# Altium PCB motor_driver6.PcbDoc
Units mm, origin at the board's own origin, x right, y up, seen from the top; angles counter-clockwise.
Board outline 27.3 x 14.1 mm, 2 copper layers (Top Layer, Bottom Layer); 20 components, 20 nets, 68 pads, 9 vias.
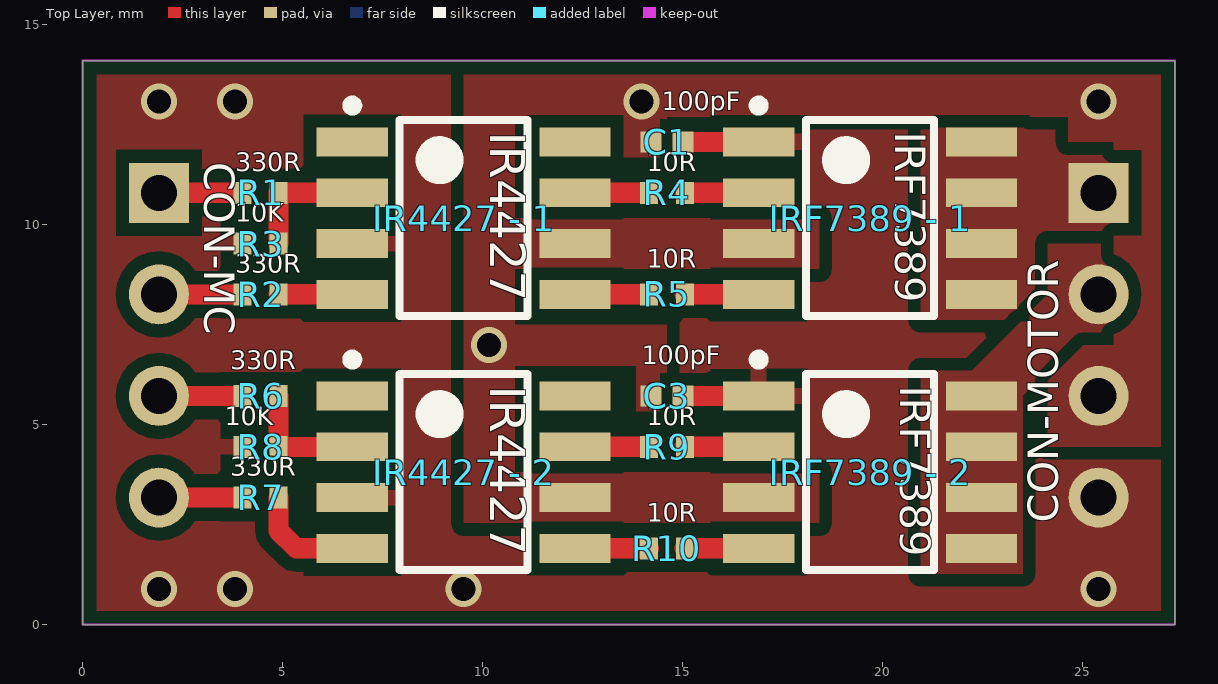
[diagram p0: Top Layer view]
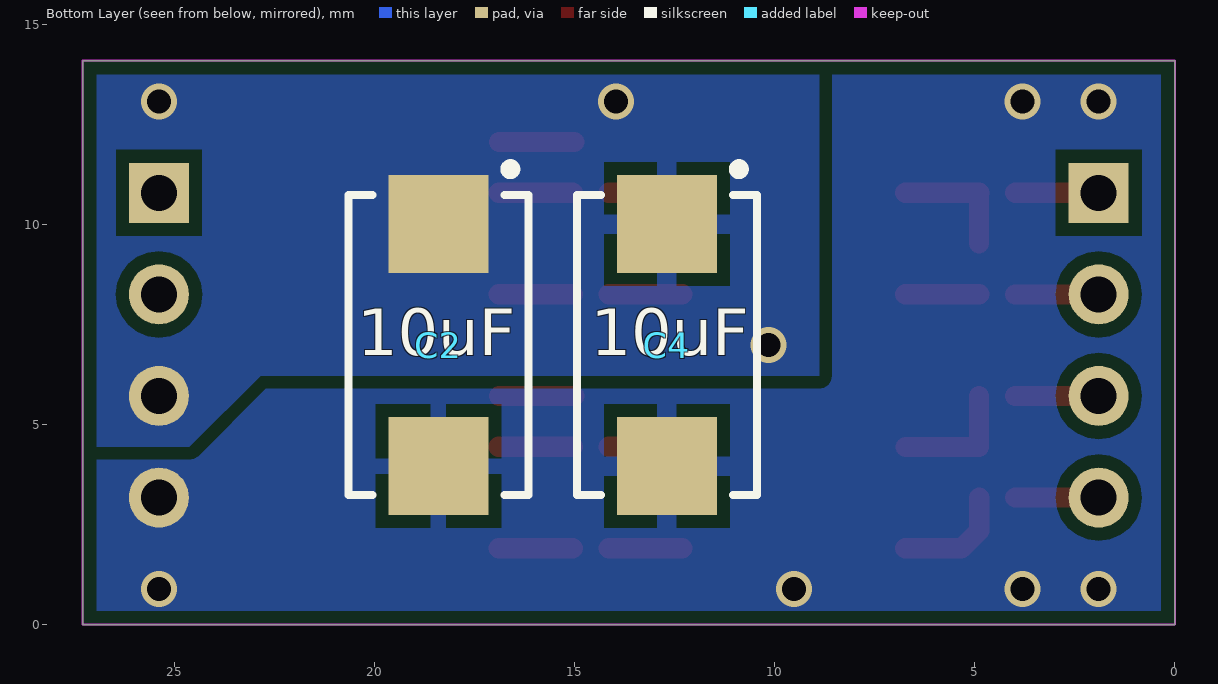
[diagram p1: Bottom Layer view, seen from below]

## Layer stack, top to bottom
Top Solder: solder mask 0.0102, Solder Resist, Dk 3.5
Top Layer: signal copper 0.0356
Dielectric 1: dielectric 0.32, FR-4, Dk 4.8
Bottom Layer: signal copper 0.0356
Bottom Solder: solder mask 0.0102, Solder Resist, Dk 3.5

## Board outline
0,0 27.305,0 27.305,14.097 0,14.097

## Design rules (kind name [scope] priority, off if disabled: settings)
Clearance Clearance_1 [InNamedPolygon('VCC_L02_P075')] p1 off: gap=0.16 ignorepadtopadclearanceinfootprint=FALSE except(0: Arc-Hole Track-Hole SMDPad-Hole THPad-Hole Via-Hole Fill-Hole Poly-Hole Region-Hole Text-Hole)
Clearance [All] p2: gap=0.32 ignorepadtopadclearanceinfootprint=FALSE except(0: Arc-Hole Track-Hole SMDPad-Hole THPad-Hole Via-Hole Fill-Hole Poly-Hole Region-Hole Text-Hole; 0.28: Track-SMDPad SMDPad-SMDPad)
MinimumSolderMaskSliver [All] p1 off: minsoldermaskwidth=0.254
PlaneConnect [All] p1: planeconnectstyle=Relief reliefexpansion=0.508 reliefentries=4 reliefconductorwidth=0.5 reliefairgap=0.254
PolygonConnect [IsVia] p1: connectstyle=Direct reliefconductorwidth=0.254 reliefentries=4 polygonreliefangle="90 Angle" airgapwidth=0.254
PolygonConnect "Schematic Polygon Connect Style_9" [InNet('MA_MBHB')] p2: connectstyle=Direct reliefconductorwidth=0.254 reliefentries=4 polygonreliefangle="45 Angle" airgapwidth=0.254
PolygonConnect "Schematic Polygon Connect Style_8" [InNet('MA')] p3: connectstyle=Direct reliefconductorwidth=0.254 reliefentries=4 polygonreliefangle="45 Angle" airgapwidth=0.254
PolygonConnect "Schematic Polygon Connect Style_7" [InComponent('C2_MAHB')] p4: connectstyle=Direct reliefconductorwidth=0.254 reliefentries=4 polygonreliefangle="45 Angle" airgapwidth=0.254
PolygonConnect "Schematic Polygon Connect Style" [InComponent('C2_MBHB')] p5: connectstyle=Relief reliefconductorwidth=0.5 reliefentries=4 polygonreliefangle="90 Angle" airgapwidth=0.32
PolygonConnect PolygonConnect_2 [IsThruPin] p6: connectstyle=Direct reliefconductorwidth=0.5 reliefentries=4 polygonreliefangle="90 Angle" airgapwidth=0.254
PolygonConnect "Schematic Polygon Connect Style_5" [InNet('NetIC2_4')] p7 off: connectstyle=Direct reliefconductorwidth=0.254 reliefentries=4 polygonreliefangle="45 Angle" airgapwidth=0.254
PolygonConnect "Schematic Polygon Connect Style_4" [InNet('NetIC4_2')] p8 off: connectstyle=Direct reliefconductorwidth=0.254 reliefentries=4 polygonreliefangle="45 Angle" airgapwidth=0.254
PolygonConnect "Schematic Polygon Connect Style_3" [InNet('NetIC4_4')] p9 off: connectstyle=Direct reliefconductorwidth=0.254 reliefentries=4 polygonreliefangle="45 Angle" airgapwidth=0.254
PolygonConnect "Schematic Polygon Connect Style_2" [InNet('NetIC4_5')] p10 off: connectstyle=Direct reliefconductorwidth=0.254 reliefentries=4 polygonreliefangle="45 Angle" airgapwidth=0.254
PolygonConnect "Schematic Polygon Connect Style_1" [InNet('MA')] p11 off: connectstyle=Direct reliefconductorwidth=0.254 reliefentries=4 polygonreliefangle="45 Angle" airgapwidth=0.254
PolygonConnect PolygonConnect_1 [InNet('VCC')] p12: connectstyle=Direct reliefconductorwidth=0.5 reliefentries=4 polygonreliefangle="90 Angle" airgapwidth=0.254
PolygonConnect PolygonConnect_3 [All] p13: connectstyle=Relief reliefconductorwidth=0.4 reliefentries=4 polygonreliefangle="90 Angle" airgapwidth=0.32
RoutingVias [All] p1: holewidth=0.3 width=0.6 viastyle="Through Hole" minholewidth=0.2 minwidth=0.5 maxholewidth=0.4 maxwidth=1.27
SilkToSilkClearance [All] p1 off: silktosilkclearance=0.254
SilkToSolderMaskClearance [IsPad] p1 off: minsilkscreentomaskgap=0.254 clearancetoexposedcopper=TRUE
SolderMaskExpansion [All] p1: expansion=0.102
Width [All] p1: maxlimit=1 minlimit=0.254 preferedwidth=0.254
26 further rules are at their usual default settings.

## Classes and differential pairs
component class motor_driver: CON-MC CON-MOTOR R4 R5
component class MAHB: C1 C3 "IR4427 - 1" "IRF7389 - 1" R1 R2 R3 R4 R5
component class MBHB: C3 R1 R4
channel class half_bridge: MAHB MBHB

## Components (designator, comment, footprint, x,y, rotation, side; value= is the part's Value field where it differs from the comment)
C1 "100pF" 0402-CAP 14.605,12.065 r0 top
C2 "4,7UF" PCBComponent 18.415,6.985 r270 bottom
C3 "100pF" 0402-CAP 14.605,5.715 r0 top (schematic designator C1)
C4 "4,7UF" PCBComponent 12.7,6.985 r270 bottom (schematic designator C2)
CON-MC "22032041" 04x01_Conector_Male 1.905,6.985 r90 top
CON-MOTOR "22032041" 04x01_Conector_Male 25.4,6.985 r90 top
"IR4427 - 1" "IR4427STRPBF" IR4427-PCB 9.525,10.16 r0 top (schematic designator IR4427)
"IR4427 - 2" "IR4427STRPBF" IR4427-PCB 9.525,3.81 r0 top (schematic designator IR4427)
"IRF7389 - 1" "IRF7389TRPBF" IRF7389-PCB 19.685,10.16 r0 top (schematic designator IRF7389)
"IRF7389 - 2" "IRF7389TRPBF" IRF7389-PCB 19.685,3.81 r0 top (schematic designator IRF7389)
R1 "330R" 0402-RES-HD 4.445,10.795 r0 top
R2 "330R" 0402-RES-HD 4.445,8.255 r0 top
R3 "10K" 0402-RES-HD 4.445,9.525 r0 top
R4 "10R" 0402-RES-HD 14.605,10.795 r0 top
R5 "10R" 0402-RES-HD 14.605,8.255 r0 top
R6 "330R" 0402-RES-HD 4.445,5.715 r0 top (schematic designator R1)
R7 "330R" 0402-RES-HD 4.445,3.175 r0 top (schematic designator R2)
R8 "10K" 0402-RES-HD 4.445,4.445 r0 top (schematic designator R3)
R9 "10R" 0402-RES-HD 14.605,4.445 r0 top (schematic designator R4)
R10 "10R" 0402-RES-HD 14.605,1.905 r0 top (schematic designator R5)

## Footprints (in the part's own frame and the unit in brackets; to place one, negate y for a bottom-side part, rotate by r counter-clockwise, add the part's x,y. Pads: shape width x height; smd on the part's side, far side on the other; paste and mask are expansions set on the pad)
04x01_Conector_Male [mm] "0022032041"
  round 1.5 hole 0.9: 0(-3.81,0) 1(-1.27,0) 2(1.27,0)
  rect 1.5x1.5 hole 0.9: 3(3.81,0)
  body extent -4.95,-1.18 4.95,1.18, height 3.38
0402-CAP [mm] "Chip Capacitor, Body 1.0x0.5mm, Height 0.6mm, IPC Medium Density"
  rect 0.52x0.52 smd: 1(-0.4,0) 2(0.4,0)
  body extent -0.55,-0.3 0.55,0.3, height 0.33
0402-RES-HD [mm] "Chip Resistor, Body 1.0x0.5mm, IPC High Density"
  rect 0.45x0.55 smd: 1(-0.45,0) 2(0.45,0)
  body extent -0.52,-0.27 0.53,0.28, height 0.4
IR4427-PCB [mm] "SOIC, 8-Leads, Body 4,85x3,90mm, Pitch 1,27mm, IPC Medium Density"
  rect 1.78x0.72 smd: 1(-2.785,1.905) 2(-2.785,0.635) 3(-2.785,-0.635) 4(-2.785,-1.905) 5(2.785,-1.905) 6(2.785,-0.635) 7(2.785,0.635) 8(2.785,1.905)
  silkscreen extent -2.91,-2.45 1.6,2.94, body extent -2,-2.45 2,2.45, height 1.75
IRF7389-PCB [mm] "SOIC, 8-Leads, Body 4,85x3,90mm, Pitch 1,27mm, IPC Medium Density"
  rect 1.78x0.72 smd: 1(-2.785,1.905) 2(-2.785,0.635) 3(-2.785,-0.635) 4(-2.785,-1.905) 5(2.785,-1.905) 6(2.785,-0.635) 7(2.785,0.635) 8(2.785,1.905)
  silkscreen extent -2.91,-2.45 1.6,2.94, body extent -2,-2.45 2,2.45, height 1.75
PCBComponent [mm]
  rect 2.45x2.5 smd: 1(-3.025,0) 2(3.025,0)
  silkscreen extent -4.52,-2.25 3.75,2.25, body extent -3.75,-2.25 3.75,2.25, height 2.9

## Part data
C1 C3: library part CC0402-100pF-A.2, "CAP CER 100PF 50V 1% NP0 0402"
C2 C4: library part TPSD106K035R0300-01.A.1, "Tantalum Capacitors - Solid SMD 10uF 35V 10% L ESR"
CON-MC CON-MOTOR: library part 04x01_Conector_Male-SCH, "CONN HEADER 4POS .100 VERT TIN"
"IR4427 - 1" "IR4427 - 2": library part IR4427, "IC DRIVER DUAL LOW SIDE 8-DIP"
"IRF7389 - 1" "IRF7389 - 2": library part IRF7389, "MOSFET N/P-CH 30V 8-SOIC"
R1 R2 R6 R7: library part R0402-330R-7, "RES 330 OHM 1/10W 1% 0402 SMD"
R3 R8: library part R0402-10K-10, "RES 10K OHM 1/10W 1% 0402 SMD"
R4 R5 R9 R10: library part R0402-10R-6, "RES 10 OHM 1/10W 1% 0402 SMD"

## Via types
v1: diameter 0.9, hole 0.6, Top Layer to Bottom Layer, 9 vias

## Nets (pads, with @x,y where several pads share a name; then routed paths per layer and width w, separated by ;. In a path a pad name is that pad's centre, name@x,y a point inside that pad or via, vN(x,y) a via of type N, cw(c..) or ccw(c..) an arc to the next point about the centre after c; other vN are vias at no path point)
GND: "IR4427 - 1.3" "IR4427 - 2.3" "IRF7389 - 1.1" "IRF7389 - 2.1" C1.2 C2.2 C3.2 C4.2 CON-MOTOR.0 R3.1 R8.1 | length 3.8
  Top Layer w0.5: C3.2 16.9,5.715 ; C1.2 16.9,12.065
  other v1: 1.905,0.889 3.81,0.889 9.525,0.889 25.4,0.889 1.905,13.081 3.81,13.081
MA: "IRF7389 - 2.5" "IRF7389 - 2.6" "IRF7389 - 2.7" "IRF7389 - 2.8" CON-MOTOR.2
MA_MBHB: "IRF7389 - 1.5" "IRF7389 - 1.6" "IRF7389 - 1.7" "IRF7389 - 1.8" CON-MOTOR.3
MAH: CON-MC.0 R7.1 | length 2.1
  Top Layer w0.508: CON-MC.0 R7.1
MAL: CON-MC.1 R6.1 | length 2.1
  Top Layer w0.5: CON-MC.1 R6.1
MBH: CON-MC.2 R2.1 | length 2.1
  Top Layer w0.5: CON-MC.2 R2.1
MBL: CON-MC.3 R1.1 | length 2.1
  Top Layer w0.508: CON-MC.3 R1.1
NetIR4427_MAHB_2: "IR4427 - 2.2" R6.2 R8.2 | length 3.1
  Top Layer w0.5: R6.2 R8.2 6.74,4.445
NetIR4427_MAHB_4: "IR4427 - 2.4" R7.2 | length 2.9
  Top Layer w0.508: R7.2 4.895,2.344 5.334,1.905 6.74,1.905
NetIR4427_MAHB_5: "IR4427 - 2.5" R10.1 | length 1.8
  Top Layer w0.508: 12.31,1.905 R10.1
NetIR4427_MAHB_7: "IR4427 - 2.7" R9.1 | length 1.8
  Top Layer w0.508: 12.31,4.445 R9.1
NetIR4427_MBHB_2: "IR4427 - 1.2" R1.2 R3.2 | length 3.1
  Top Layer w0.5: R3.2 R1.2
  Top Layer w0.508: R1.2 6.74,10.795
NetIR4427_MBHB_4: "IR4427 - 1.4" R2.2 | length 1.8
  Top Layer w0.508: R2.2 6.74,8.255
NetIR4427_MBHB_5: "IR4427 - 1.5" R5.1 | length 1.8
  Top Layer w0.508: 12.31,8.255 R5.1
NetIR4427_MBHB_7: "IR4427 - 1.7" R4.1 | length 1.8
  Top Layer w0.508: 12.31,10.795 R4.1
NetIRF7389_MAHB_2: "IRF7389 - 2.2" R9.2 | length 1.8
  Top Layer w0.508: R9.2 16.9,4.445
NetIRF7389_MAHB_4: "IRF7389 - 2.4" R10.2 | length 1.8
  Top Layer w0.508: R10.2 16.9,1.905
NetIRF7389_MBHB_2: "IRF7389 - 1.2" R4.2 | length 1.8
  Top Layer w0.508: R4.2 16.9,10.795
NetIRF7389_MBHB_4: "IRF7389 - 1.4" R5.2 | length 1.8
  Top Layer w0.508: R5.2 16.9,8.255
VCC: "IR4427 - 1.6" "IR4427 - 2.6" "IRF7389 - 1.3" "IRF7389 - 2.3" C1.1 C2.1 C3.1 C4.1 CON-MOTOR.1
  other v1: 10.16,6.985 13.97,13.081 25.4,13.081
pads on no net: "IR4427 - 1.1" "IR4427 - 1.8" "IR4427 - 2.1" "IR4427 - 2.8"

## Polygon pours and split planes (outlines as drawn)
MA on Top Layer "Top Layer-No Net" (solid, remove dead copper, pour order 74): 26.289,9.525 24.13,9.525 24.13,8.255 22.225,6.35 20.955,6.35 20.955,1.27 23.495,1.27 23.495,5.715 24.765,6.985 26.289,6.985
VCC on Top Layer "Top Layer-No Net" (solid, remove dead copper, pour order 73): 24.13,4.445 24.13,6.096 24.638,6.604 25.019,6.985 25.781,6.985 25.781,12.065 24.638,12.065 24.638,12.7 25.781,12.7 20.955,12.7 19.431,12.7 14.605,12.7 14.605,11.684 13.335,11.684 13.335,12.7 10.795,12.7 10.795,10.16 18.415,10.16 18.415,8.89 10.795,8.89 10.795,7.493 14.605,7.493 14.605,6.477 14.605,5.334 13.843,5.334 13.843,6.477 10.795,6.477 10.795,3.81 18.415,3.81 18.415,2.54 9.525,2.54 9.525,13.97 27.305,13.97 27.305,4.445
MA_MBHB on Top Layer "Top Layer-No Net" (solid, remove dead copper, pour order 78): 20.955,7.62 20.955,12.7 26.67,12.7 26.67,9.525 25.4,9.525 24.13,8.255 24.13,7.62
GND on Top Layer "Top Layer-No Net" (solid, remove dead copper, pour order 90): 0,14.097 27.305,14.097 27.305,0 0,0
GND on Bottom Layer "Top Layer-No Net" (solid, remove dead copper, pour order 94): 27.305,0 27.305,14.097 0,14.097 0,0
VCC on Bottom Layer "Top Layer-No Net" (solid, remove dead copper, pour order 77): 27.305,4.445 24.638,4.445 22.86,6.223 8.89,6.223 8.89,6.985 8.89,14.097 27.305,14.097

## Keep-outs
Keep-Out Layer:
  the board outline again, w0.05

## Silkscreen, mask and mechanical layers (free items; w line width, h text height)
Top Overlay:
  text "100pF" at 14.478,12.7 h0.8
  text "IR4427" at 9.906,12.319 h1.5 r270
  text "IRF7389" at 20.066,12.319 h1.3 r270
  text "330R" at 3.81,11.176 h0.8
  text "10R" at 14.097,11.176 h0.8
  text "10K" at 3.81,9.906 h0.8
  text "10R" at 14.097,8.763 h0.8
  text "330R" at 3.81,8.636 h0.8
  text "100pF" at 13.97,6.35 h0.8
  text "330R" at 3.683,6.223 h0.8
  text "IR4427" at 9.906,5.969 h1.5 r270
  text "IRF7389" at 20.193,5.969 h1.3 r270
  text "10K" at 3.556,4.826 h0.8
  text "10R" at 14.097,4.826 h0.8
  text "330R" at 3.683,3.556 h0.8
  text "10R" at 14.097,2.413 h0.8
Bottom Overlay:
  text "10uF" at 14.605,6.35 h2
  text "10uF" at 20.447,6.35 h2